# Altium PCB RecycleBin-4-V8.pcbdoc (part 1 of 2)
Units mm, origin at the board's own origin, x right, y up, seen from the top; angles counter-clockwise.
Board outline 100 x 100 mm, 2 copper layers (Top Layer, Bottom Layer); 155 components, 225 nets, 519 pads, 228 vias.
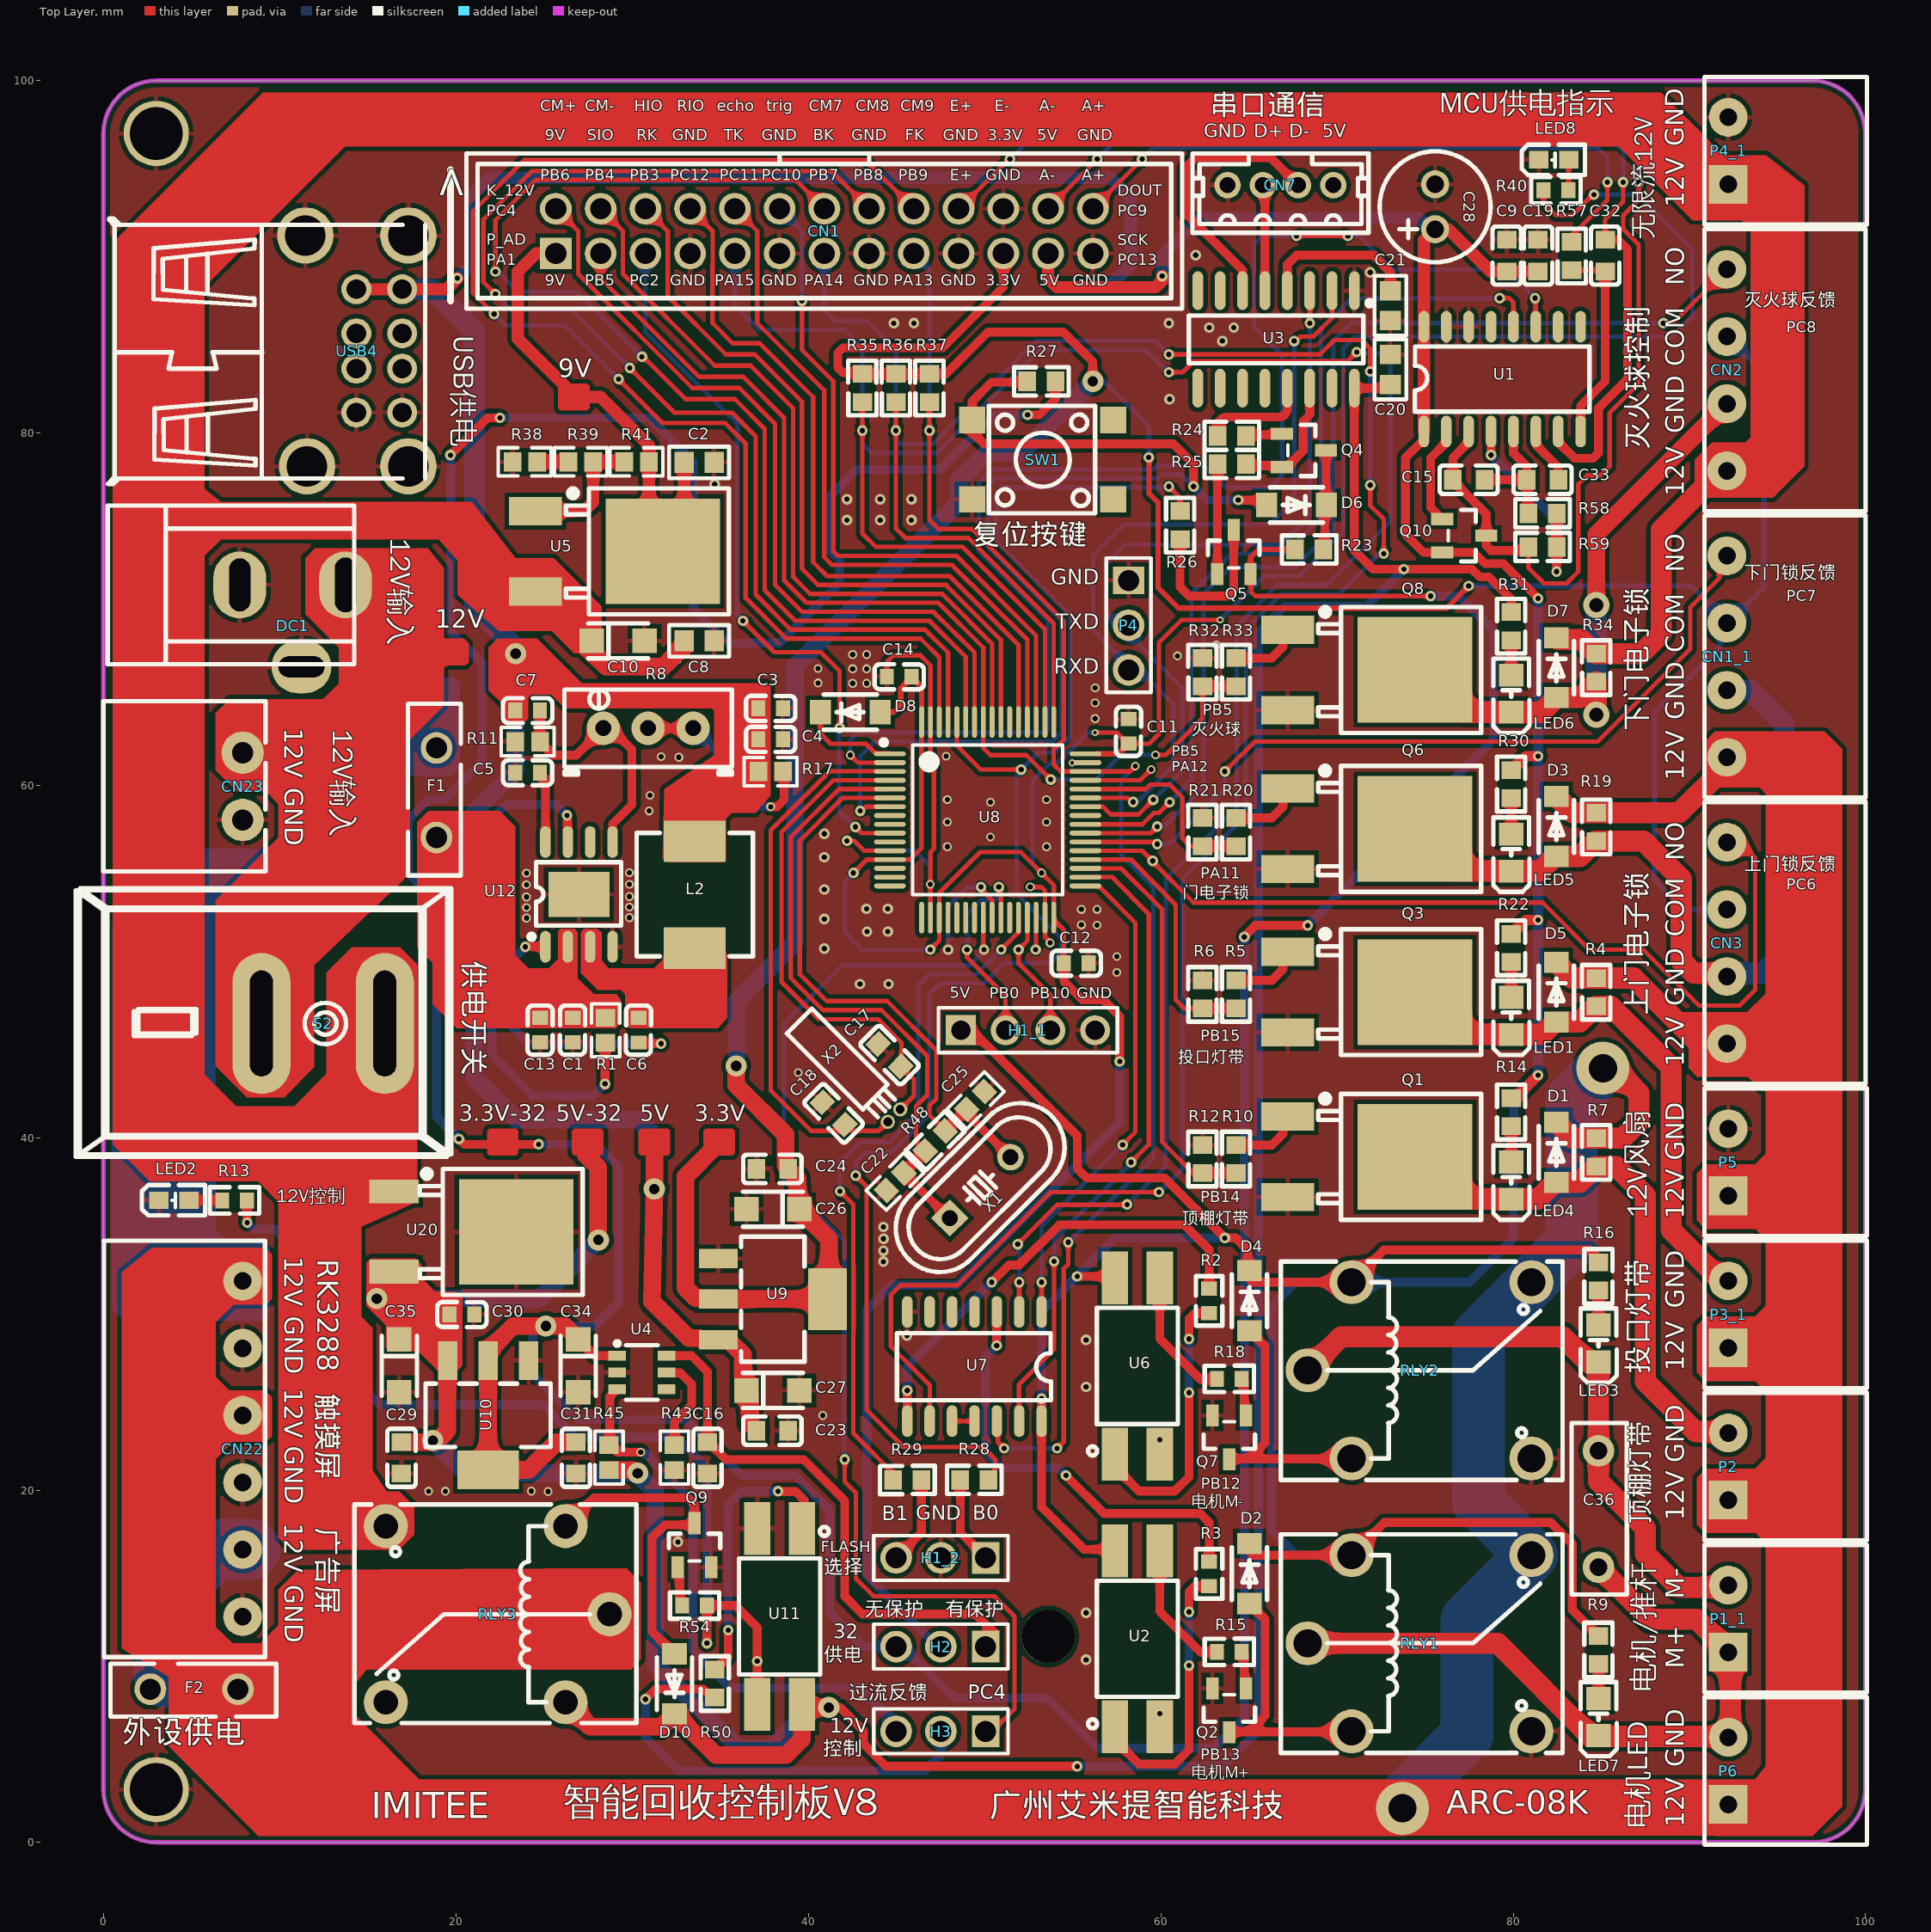
[diagram p0: Top Layer view]
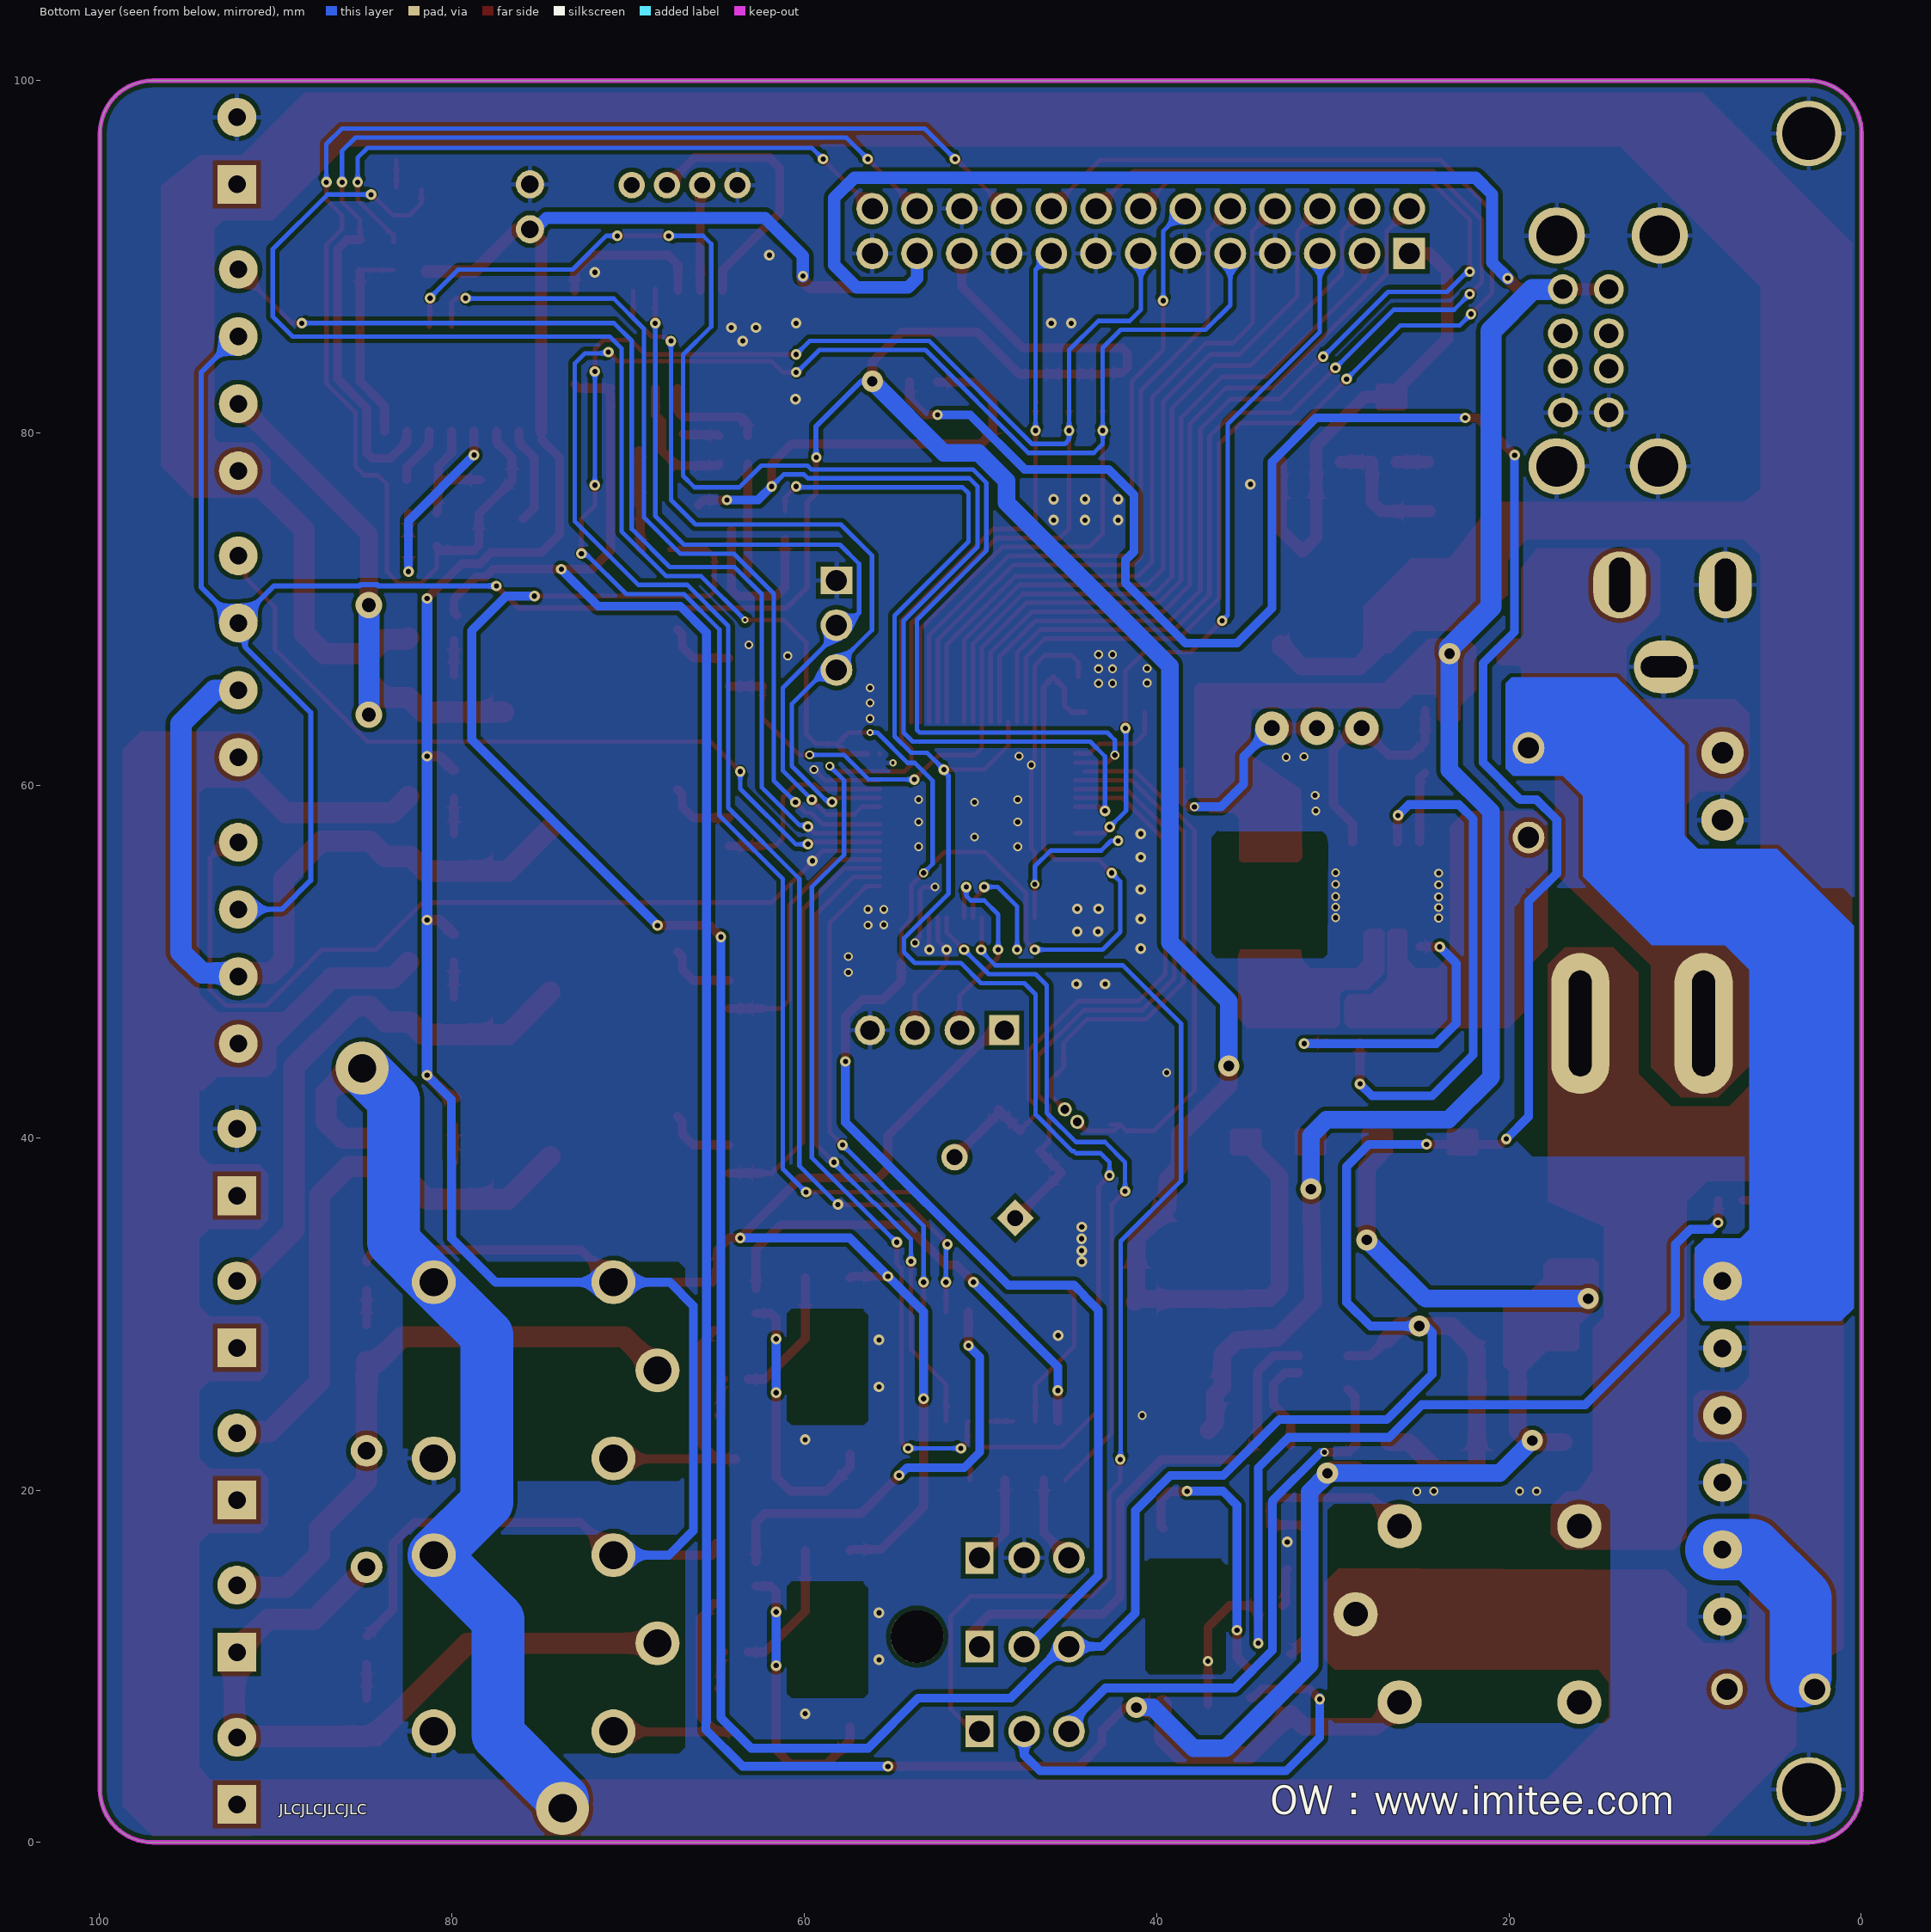
[diagram p1: Bottom Layer view, seen from below]

## Layer stack, top to bottom
Top Solder: solder mask 0.0102, Solder Resist, Dk 3.5
Top Layer: signal copper 0.0356
Dielectric1: dielectric 0.32, FR-4, Dk 4.8
Bottom Layer: signal copper 0.0356
Bottom Solder: solder mask 0.0102, Solder Resist, Dk 3.5

## Board outline
-0.026,3 -0.026,97 cw(c2.974,97) 2.974,100 96.974,100 cw(c96.974,97) 99.974,97 99.974,3 cw(c96.974,3) 96.974,0 2.974,0 cw(c2.974,3)

## Design rules (kind name [scope] priority, off if disabled: settings)
Clearance [All] p1: gap=0.254 ignorepadtopadclearanceinfootprint=FALSE except(0: Arc-Hole Track-Hole SMDPad-Hole THPad-Hole Via-Hole Fill-Hole Poly-Hole Region-Hole Text-Hole)
PolygonConnect [All] p1: connectstyle=Relief reliefconductorwidth=0.254 reliefentries=4 polygonreliefangle="90 Angle" airgapwidth=0.254
RoutingVias [All] p1: holewidth=0.711 width=1.27 viastyle="Through Hole" minholewidth=0.711 minwidth=1.27 maxholewidth=0.711 maxwidth=1.27
SolderMaskExpansion [All] p1: expansion=0.102
Width [All] p1: maxlimit=3 minlimit=0.254 preferedwidth=0.5 minimp=50.000000 maximp=50.000000 favimp=50.000000
30 further rules are at their usual default settings.

## Components (designator, comment, footprint, x,y, rotation, side; value= is the part's Value field where it differs from the comment)
C1 "10uf" C0603#1 26.61,46.105 r90 top (schematic designator C39)
C2 "1uF" C0603#2 34.638,78.325 r180 top
C3 "22 uf" C0603#1 37.846,64.376 r180 top (schematic designator C36)
C4 "22 uf" C0603#1 37.846,62.618 r180 top (schematic designator C37)
C5 "0.1uf" C0603#1 24.052,60.706 r0 top (schematic designator C34)
C6 "0.1uf" C0603#1 30.353,46.101 r90 top (schematic designator C35)
C7 "200pf" C0603#1 24.052,64.249 r180 top (schematic designator C16)
C8 "10nF" C0603#2 34.638,68.199 r180 top
C9 "1uF" C0603#3 79.629,90.071 r90 top
C10 "10uF" CAP-SMD_L3.2-W1.6-R-RD 29.184,68.199 r180 top
C11 "100nF" C0603#1 58.168,63.064 r90 top (schematic designator C7)
C12 "100nF" C0603#1 55.189,49.911 r180 top (schematic designator C7)
C13 "10 uf" C0603#1 24.767,46.105 r90 top (schematic designator C38)
C14 "100nF" C0603#1 45.14,66.167 r180 top (schematic designator C7)
C15 "1uF" C0603#3 77.469,77.343 r0 top
C16 "470nF" C0603#3 34.263,21.831 r90 top (schematic designator C9)
C17 "10pF" C0603#3 44.596,44.682 r315 top
C18 "10pF" C0603#3 41.421,41.38 r315 top
C19 "100nF" C0603#3 81.407,90.071 r90 top
C20 "100nF" C0603#2 73.025,82.756 r90 top
C21 "100nF" C0603#2 73.025,88.072 r270 top
C22 "22pF" 0603 44.907,37.503 r45 top
C23 "100nF" C0603#3 37.945,23.368 r180 top (schematic designator C9)
C24 "100nF" C0603#3 37.945,38.227 r180 top (schematic designator C9)
C25 "22pF" 0603 49.479,42.119 r225 top
C26 "10uF" CAP-SMD_L3.2-W1.6-R-RD 37.973,35.941 r0 top
C27 "10uF" CAP-SMD_L3.2-W1.6-R-RD 37.973,25.654 r180 top
C28 "220uF" CAP-TH_BD6.3-P2.50-D1.0-FD 75.565,92.837 r90 top
C29 "100nF" C0603#3 16.891,21.831 r90 top (schematic designator C9)
C30 "22uF" C0603#1 20.32,29.972 r180 top
C31 "100nF" C0603#3 26.797,21.831 r90 top (schematic designator C9)
C32 "100nF" C0603#3 85.217,90.071 r90 top
C33 "1uF" C0603#3 81.661,77.343 r180 top
C34 "10uF" CAP-SMD_L3.2-W1.6-R-RD 26.924,27.051 r90 top
C35 "10uF" CAP-SMD_L3.2-W1.6-R-RD 16.764,27.051 r90 top
C36 "100nF" CAP-TH_L13.0-W6.0-P10.00-D0.6 84.836,18.83 r270 top
CN1 "Shenzhen" CONN-TH_26P-P2.54_B-3000S26P-0110 40.894,91.46 r0 top
CN1_1 "WJ15EDGRC-3.81-4P" CONN-TH_WJ15EDGRC-3.81-4P 92.122,67.31 r90 top (schematic designator CN1)
CN2 "WJ15EDGRC-3.81-4P" CONN-TH_WJ15EDGRC-3.81-4P 92.122,83.566 r90 top
CN3 "WJ15EDGRC-3.81-4P" CONN-TH_WJ15EDGRC-3.81-4P 92.122,51.054 r90 top
CN7 "A2001WV-4P" CONN-TH_A2001WV-4P 66.786,94.061 r180 top
CN22 "WJ15EDGRC-3.81-6P" CONN-TH_WJ15EDGRC-3.81-6P 7.874,22.336 r270 top
CN23 "KF2EDGR-3.81-2P" CONN-TH_2P-P3.81_KF2EDGR-3.81-2P 7.874,59.944 r270 top
D1 "1N4148W T4" SOD-123_L2.8-W1.8-LS3.7-RD 82.448,39.167 r270 top
D2 "1N4148W T4" SOD-123_L2.8-W1.8-LS3.7-RD 65.024,15.257 r270 top
D3 "1N4148W T4" SOD-123_L2.8-W1.8-LS3.7-RD 82.448,57.666 r270 top
D4 "1N4148W T4" SOD-123_L2.8-W1.8-LS3.7-RD 65.024,30.747 r270 top
D5 "1N4148W T4" SOD-123_L2.8-W1.8-LS3.7-RD 82.448,48.26 r270 top
D6 "1N4148W T4" SOD-123_L2.8-W1.8-LS3.7-RD 67.691,75.912 r180 top
D7 "1N4148W T4" SOD-123_L2.8-W1.8-LS3.7-RD 82.448,66.675 r270 top
D8 "1N4148W T4" SOD-123_L2.8-W1.8-LS3.7-RD 42.364,64.152 r0 top (schematic designator D6)
D10 "1N4148W T4" SOD-123_L2.8-W1.8-LS3.7-RD 32.385,9.004 r90 top
DC1 "DC-5.5*2.1" DC5.5*2.1MM 10.711,69.049 r90 top
F1 "A30-300" FUSE-TH_11.4-W3.0-P5.10-D0.8-S1.20#1 18.761,60.579 r270 top
F2 "A30-300" FUSE-TH_11.4-W3.0-P5.10-D0.8-S1.20#2 6.075,8.636 r180 top (schematic designator F1)
H1_1 "Header-Male-2.54_1x4_C59481" HDR-TH_4P-P2.54-V 52.451,46.101 r0 top (schematic designator H1)
H1_2 "Header-Male-2.54_1x3" HDR-TH_3P-P2.54-V 47.51,16.15 r180 top (schematic designator H1)
H2 "Header-Male-2.54_1x3" HDR-TH_3P-P2.54-V 47.51,11.115 r180 top
H3 "Header-Male-2.54_1x3" HDR-TH_3P-P2.54-V 47.51,6.307 r180 top
L2 "10uh" IND-SMD_L7.0-W6.6_FXL0630 33.537,53.792 r90 top
LED1 "17-21/GHC-XS1T2M/3T" LED0805-R-RD 79.883,46.911 r90 top
LED2 "19-217/GHC-YR1S2/3T" LED0603-R-RD 3.975,36.449 r0 top
LED3 "17-21/GHC-XS1T2M/3T" LED0805-R-RD 84.836,28.321 r90 top
LED4 "17-21/GHC-XS1T2M/3T" LED0805-R-RD 79.883,37.564 r90 top
LED5 "17-21/GHC-XS1T2M/3T" LED0805-R-RD 79.883,56.182 r90 top
LED6 "17-21/GHC-XS1T2M/3T" LED0805-R-RD 79.883,65.199 r90 top
LED7 "17-21/GHC-XS1T2M/3T" LED0805-R-RD 84.836,7.116 r90 top
LED8 "19-217/GHC-YR1S2/3T" LED0603-R-RD 82.296,95.504 r0 top (schematic designator LED2)
P1_1 "WJ15EDGRC-3.81-2P" CONN-TH_2P-P3.81_WJ15EDGRC-3.81-2P 92.202,12.7 r90 top (schematic designator P1)
P2 "WJ15EDGRC-3.81-2P" CONN-TH_2P-P3.81_WJ15EDGRC-3.81-2P 92.202,21.336 r90 top
P3_1 "WJ15EDGRC-3.81-2P" CONN-TH_2P-P3.81_WJ15EDGRC-3.81-2P 92.202,29.972 r90 top (schematic designator P3)
P4 "Header-Female-2.54_1x3" HDR-TH_3P-P2.54-V 58.166,69.088 r270 top
P4_1 "WJ15EDGRC-3.81-2P" CONN-TH_2P-P3.81_WJ15EDGRC-3.81-2P 92.202,96.012 r90 top (schematic designator P4)
P5 "WJ15EDGRC-3.81-2P" CONN-TH_2P-P3.81_WJ15EDGRC-3.81-2P 92.202,38.608 r90 top
P6 "WJ15EDGRC-3.81-2P" CONN-TH_2P-P3.81_WJ15EDGRC-3.81-2P 92.202,4.064 r90 top
Q1 "AOD4184L" TO-252-2_L6.6-W6.1-P4.57-LS9.9-TL-CW 70.805,38.913 r0 top
Q2 "S8050_C266592" SOT-23-3_L2.9-W1.3-P1.90-LS2.4-BR 63.881,7.493 r90 top
Q3 "AOD4184L" TO-252-2_L6.6-W6.1-P4.57-LS9.9-TL-CW 70.805,48.26 r0 top
Q4 "S8050" SOT-23-3_L2.9-W1.6-P1.90-LS2.8-BR 68.116,79.006 r180 top
Q5 "S8550" SOT-23-3_L2.9-W1.3-P1.90-LS2.4-BR 64.135,73.245 r270 top
Q6 "AOD4184L" TO-252-2_L6.6-W6.1-P4.57-LS9.9-TL-CW 70.805,57.531 r0 top
Q7 "S8050_C266592" SOT-23-3_L2.9-W1.3-P1.90-LS2.4-BR 63.881,22.987 r90 top
Q8 "AOD4184L" TO-252-2_L6.6-W6.1-P4.57-LS9.9-TL-CW 70.805,66.548 r0 top
Q9 "S8050_C266592" SOT-23-3_L2.9-W1.3-P1.90-LS2.4-BR 33.528,16.869 r270 top
Q10 "S8550" SOT-23-3_L2.9-W1.6-P1.90-LS2.8-BR 77.216,74.168 r180 top
R1 "100K" 0603 28.474,46.101 r90 top (schematic designator R39)
R2 "1K" R0603#1 62.738,30.734 r90 top
R3 "1K" R0603#1 62.738,15.24 r90 top
R4 "51K" R0603#2 84.709,48.26 r90 top
R5 "100" R0603#2 64.262,48.133 r90 top
R6 "10K" R0603#2 62.357,48.133 r90 top
R7 "51K" R0603#2 84.709,39.167 r90 top
R8 "20k" RES-ADJ-TH_3P-L9.5-W4.9-P2.50-L_3296W 30.897,63.24 r0 top (schematic designator R36)
R9 "4.7K" R0603#2 84.836,10.922 r90 top
R10 "100" R0603#2 64.262,38.786 r90 top
R11 "10K" 0603 24.052,62.478 r180 top (schematic designator R39)
R12 "10K" R0603#2 62.357,38.786 r90 top
R13 "1K" R0603#1 7.416,36.441 r180 top
R14 "2K" R0603#2 79.883,41.453 r90 top
R15 "510" R0603#1 63.881,10.814 r0 top
R16 "4.7K" R0603#2 84.836,32.131 r90 top
R17 "30K" 0603 37.846,60.775 r0 top (schematic designator R39)
R18 "510" R0603#1 63.881,26.308 r0 top
R19 "51K" R0603#2 84.709,57.634 r90 top
R20 "100" R0603#2 64.262,57.348 r90 top
R21 "10K" R0603#2 62.357,57.348 r90 top
R22 "2K" R0603#2 79.883,50.774 r90 top
R23 "10K" R0603#2 68.416,73.389 r180 top
R24 "1K" R0603#2 64.019,79.831 r0 top
R25 "1K" R0603#2 64.02,78.244 r180 top
R26 "1K" R0603#2 61.087,74.769 r270 top
R27 "10K" R0603#2 53.213,82.931 r180 top
R28 "0" R0603#2 49.403,20.574 r0 top
R29 "10K" R0603#2 45.606,20.573 r0 top
R30 "2K" R0603#2 79.883,60.071 r90 top
R31 "2K" R0603#2 79.883,69.028 r90 top
R32 "10K" R0603#2 62.357,66.421 r90 top
R33 "100" R0603#2 64.262,66.421 r90 top
R34 "51K" R0603#2 84.709,66.675 r90 top
R35 "100" R0603#2 43.053,82.55 r90 top
R36 "100" R0603#2 44.957,82.55 r90 top
R37 "100" R0603#2 46.863,82.55 r90 top
R38 "1.5K" 0603 23.891,78.359 r0 top
R39 "1K" 0603 27.066,78.359 r0 top (schematic designator R38)
R40 "1K" R0603#1 82.423,93.782 r0 top (schematic designator R13)
R41 "6.2K" 0603 30.233,78.359 r0 top (schematic designator R39)
R43 "14K" 0603 32.385,21.844 r90 top (schematic designator R39)
R45 "1K" 0603 28.671,21.844 r90 top (schematic designator R39)
R48 "1M" R0603#2 47.193,39.819 r45 top
R50 "1K" R0603#2 34.671,9.017 r270 top
R54 "510" R0603#1 33.528,13.443 r180 top
R57 "1K" R0603#2 83.312,90.044 r270 top
R58 "8.2K" R0603#2 81.661,75.438 r0 top
R59 "20K" R0603#2 81.661,73.533 r180 top
RLY1 "SRA-05VDC-CL blue" RELAY-TH_SRA-9VDC-CL#1 74.676,11.307 r0 top
RLY2 "SRA-05VDC-CL blue" RELAY-TH_SRA-9VDC-CL#1 74.676,26.797 r0 top
RLY3 "SRA-05VDC-CL blue" RELAY-TH_SRA-9VDC-CL#2 22.352,12.954 r180 top
S2 "KCD1-101" KCD1-101 12.444,46.482 r90 top
SW1 "PTS645SH43SMTR92LFS" KEY-SMD_4P-L6.0-W6.0-P4.50-LS9.0 53.29,78.486 r0 top
U1 "HX711" SOP-16_L10.0-W3.9-P1.27-LS6.0-BL 79.375,83.058 r0 top
U2 "EL817S1(C)(TU)-F" OPTO-SMD-4_L4.6-W6.5-P2.54-LS10.3-TL 58.66,11.557 r90 top
U3 "CH340C" SOP-16_150MIL 66.537,85.31 r270 top
U4 "SGM2523" SOT-23-6_L2.9-W1.6-P0.95-LS2.8-BR 30.533,26.67 r180 top
U5 "LM317MDT-TR" TO-252-2_L6.6-W6.1-P4.57-LS9.9-TL 28.108,73.279 r0 top
U6 "EL817S1(C)(TU)-F" OPTO-SMD-4_L4.6-W6.5-P2.54-LS10.3-TL 58.66,27.047 r90 top (schematic designator U1)
U7 "74HC08D,653" SOIC-14_L8.7-W3.9-P1.27-LS6.0-BL 49.415,27.011 r180 top (schematic designator U1)
U8 "STM32F103RBT6" LQFP-64_L10.0-W10.0-P0.50-LS12.0-BL 50.165,58.039 r270 top
U9 "AMS1117-3.3" SOT-223-3_L6.5-W3.4-P2.30-LS7.0-BR 37.973,30.836 r180 top
U10 "AMS1117-3.3" SOT-223-3_L6.5-W3.4-P2.30-LS7.0-BR 21.811,24.241 r90 top
U11 "EL817S1(C)(TU)-F" OPTO-SMD-4_L4.6-W6.5-P2.54-LS10.3-TL 38.354,12.827 r270 top (schematic designator U2)
U12 "FR9888SPGTR" SOIC-8_L5.0-W4.0-P1.27-LS6.0-BL-EP 26.967,53.81 r0 top (schematic designator U4)
U20 "L78M05CDT-TR" TO-252-2_L6.5-W6.1-P4.58-LS10.0-TL 19.939,34.671 r0 top
USB4 "Double layer DIP 90° white" USB-A-TH_USB-M-51 14.357,84.656 r270 top
X1 "8MHz" HC-49US_L11.5-W4.5-P4.88 49.739,37.166 r45 top
X2 "32.768KHz" OSC-TH_BD2.0-P0.70-D0.3 44.85,41.253 r315 top

## Footprints (in the part's own frame and the unit in brackets; to place one, negate y for a bottom-side part, rotate by r counter-clockwise, add the part's x,y. Pads: shape width x height; smd on the part's side, far side on the other; paste and mask are expansions set on the pad)
0603 [mm]
  rect 1x1.1 smd: 1(-0.7,0) 2(0.7,0)
  silkscreen extent -1.5,-0.8 1.5,0.8
C0603#1 [mm]
  rect 0.8x0.9 smd: 1(-0.7,0) 2(0.7,0)
  silkscreen extent -1.4,-0.7 1.4,0.72
C0603#2 [mm]
  rect 1.1x1.199 smd: 1(0,0) 2(1.699,0)
  silkscreen extent -0.85,-0.9 2.55,0.9
C0603#3 [mm]
  rect 1x1.1 smd: 1(-0.9,0) 2(0.9,0)
  silkscreen extent -1.65,-0.8 1.65,0.8
CAP-SMD_L3.2-W1.6-R-RD [mm]
  rect 1.4x1.4 smd: 1(1.5,0) 2(-1.5,0)
  silkscreen extent -1.7,-1 1.7,1
CAP-TH_BD6.3-P2.50-D1.0-FD [mm]
  round 1.6 hole 1: 1(-1.27,0) 2(1.27,0)
  silkscreen extent -3.15,-3.15 3.15,3.15
CAP-TH_L13.0-W6.0-P10.00-D0.6 [mm]
  round 1.8 hole 1: 1(-3.396,0) 2(3.209,0)
  silkscreen extent -4.98,-1.52 4.77,1.61
CONN-TH_2P-P3.81_KF2EDGR-3.81-2P [mm]
  round 2.4 hole 1.2: 1(-1.905,0) 2(1.905,0)
  silkscreen extent -4.83,-7.9 4.83,1.3
CONN-TH_2P-P3.81_WJ15EDGRC-3.81-2P [mm]
  rect 2.2x2.2 hole 1: 1(-1.905,0)
  round 2.2 hole 1: 2(1.905,0)
  silkscreen extent -4.19,-7.88 4.19,1.35
CONN-TH_26P-P2.54_B-3000S26P-0110 [mm]
  rect 1.8x1.8 hole 1.2: 1(-15.24,-1.27)
  round 1.8 hole 1.2: 2(-15.24,1.27) 3(-12.7,-1.27) 4(-12.7,1.27) 5(-10.16,-1.27) 6(-10.16,1.27) 7(-7.62,-1.27) 8(-7.62,1.27) 9(-5.08,-1.27) 10(-5.08,1.27) 11(-2.54,-1.27) 12(-2.54,1.27) 13(0,-1.27) 14(0,1.27) 15(2.54,-1.27) 16(2.54,1.27) 17(5.08,-1.27) 18(5.08,1.27) 19(7.62,-1.27) 20(7.62,1.27) 21(10.16,-1.27) 22(10.16,1.27) 23(12.7,-1.27) 24(12.7,1.27) 25(15.24,-1.27) 26(15.24,1.27)
  silkscreen extent -20.31,-4.4 20.31,4.4
CONN-TH_A2001WV-4P [mm]
  round 1.5 hole 0.9: 1(3,0) 2(1,0) 3(-1,0) 4(-3,0)
  silkscreen extent -5,-1.8 5,2.7
CONN-TH_WJ15EDGRC-3.81-4P [mm]
  round 2.2 hole 1: 1(-5.715,0) 2(-1.905,0) 3(1.905,0) 4(5.715,0)
  silkscreen extent -8,-7.88 8,1.27
CONN-TH_WJ15EDGRC-3.81-6P [mm]
  round 2.2 hole 1: 1(-9.525,0) 2(-5.715,0) 3(-1.905,0) 4(1.905,0) 5(5.715,0) 6(9.525,0)
  silkscreen extent -11.81,-7.88 11.81,1.27
DC5.5*2.1MM [mm]
  oval 3.8x3 hole 1.2 slot 3.1 at 0 deg copper offset 0.001,0: 1(2.325,-3.001)
  oval 3.8x3 hole 1.2 slot 3 at 0 deg: 2(2.325,2.999)
  oval 3x3.4 hole 1.2 slot 2.6 at 90 deg copper offset -0.001,0: 3(-2.325,-0.5)
  silkscreen extent -2.17,-3.5 6.83,10.5
FUSE-TH_11.4-W3.0-P5.10-D0.8-S1.20#1 [mm]
  round 1.8 hole 1.2: 1(-1.54,0.12) 2(3.54,0.12)
  silkscreen extent -4.05,-1.5 5.7,1.5
FUSE-TH_11.4-W3.0-P5.10-D0.8-S1.20#2 [mm]
  round 1.8 hole 1.2: 1(-1.54,-0.064) 2(3.44,-0.064)
  silkscreen extent -3.7,-1.5 5.7,1.5
HC-49US_L11.5-W4.5-P4.88 [mm]
  rect 1.5x1.5 hole 0.9: 1(-2.438,0)
  round 1.5 hole 0.9: 2(2.438,0)
  silkscreen extent -5.74,-2.5 5.74,2.5
HDR-TH_3P-P2.54-V [mm]
  rect 1.575x1.8 hole 1.2: 1(-2.54,0)
  round 1.8 hole 1.2: 2(0,0) 3(2.54,0)
  silkscreen extent -3.81,-1.27 3.81,1.27
HDR-TH_4P-P2.54-V [mm]
  rect 1.7x1.7 hole 1.1: 1(-3.81,0)
  round 1.7 hole 1.1: 2(-1.27,0) 3(1.27,0) 4(3.81,0)
  silkscreen extent -5.08,-1.27 5.08,1.27
IND-SMD_L7.0-W6.6_FXL0630 [mm]
  rect 2.35x3.5 smd: 1(-3.035,0) 2(3.035,0)
  silkscreen extent -3.5,-3.3 3.5,3.3
KCD1-101 [mm]
  oval 8x3.3 hole 1.3 slot 6 at 0 deg copper offset 0,0: 1(0,-3.5) 2(0,3.5)
  silkscreen extent -7.56,-7.28 7.68,14.04
KEY-SMD_4P-L6.0-W6.0-P4.50-LS9.0 [mm]
  rect 1.5x1.5 smd: 1(-4,2.25) 2(4,2.25) 3(-4,-2.25) 4(4,-2.25)
  silkscreen extent -3.05,-3.05 2.98,3.05
LED0603-R-RD [mil]
  rect 43x39 smd: 1(33.5,0) 2(-33.5,0)
  silkscreen extent -72,-34 70,34
LED0805-R-RD [mm]
  rect 1.3x1.4 smd: 1(1.05,0) 2(-1.05,0)
  silkscreen extent -2.22,-1.04 1.99,1.01
LQFP-64_L10.0-W10.0-P0.50-LS12.0-BL [mm]
  oval 0.28x1.796 smd: 1(-3.75,-5.55) 2(-3.25,-5.55) 3(-2.75,-5.55) 4(-2.25,-5.55) 5(-1.75,-5.55) 6(-1.25,-5.55) 7(-0.75,-5.55) 8(-0.25,-5.55) 9(0.25,-5.55) 10(0.75,-5.55) 11(1.25,-5.55) 12(1.75,-5.55) 13(2.25,-5.55) 14(2.75,-5.55) 15(3.25,-5.55) 16(3.75,-5.55) 33(3.75,5.55) 34(3.25,5.55) 35(2.75,5.55) 36(2.25,5.55) 37(1.75,5.55) 38(1.25,5.55) 39(0.75,5.55) 40(0.25,5.55) 41(-0.25,5.55) 42(-0.75,5.55) 43(-1.25,5.55) 44(-1.75,5.55) 45(-2.25,5.55) 46(-2.75,5.55) 47(-3.25,5.55) 48(-3.75,5.55)
  oval 1.796x0.28 smd: 17(5.55,-3.75) 18(5.55,-3.25) 19(5.55,-2.75) 20(5.55,-2.25) 21(5.55,-1.75) 22(5.55,-1.25) 23(5.55,-0.75) 24(5.55,-0.25) 25(5.55,0.25) 26(5.55,0.75) 27(5.55,1.25) 28(5.55,1.75) 29(5.55,2.25) 30(5.55,2.75) 31(5.55,3.25) 32(5.55,3.75) 49(-5.55,3.75) 50(-5.55,3.25) 51(-5.55,2.75) 52(-5.55,2.25) 53(-5.55,1.75) 54(-5.55,1.25) 55(-5.55,0.75) 56(-5.55,0.25) 57(-5.55,-0.25) 58(-5.55,-0.75) 59(-5.55,-1.25) 60(-5.55,-1.75) 61(-5.55,-2.25) 62(-5.55,-2.75) 63(-5.55,-3.25) 64(-5.55,-3.75)
  silkscreen extent -4.55,-6.05 4.25,4.25
OPTO-SMD-4_L4.6-W6.5-P2.54-LS10.3-TL [mm]
  rect 3x1.5 smd: 1(-5,1.27) 2(-5,-1.27) 3(5,-1.27) 4(5,1.27)
  silkscreen extent -5.08,-2.3 3.3,2.79
OSC-TH_BD2.0-P0.70-D0.3 [mm]
  round 0.8 hole 0.5: 1(0,0.5) 2(0,-0.5)
  silkscreen extent -7.6,-1 -0.54,1
R0603#1 [mm]
  rect 0.8x0.9 smd: 1(-0.7,0) 2(0.7,0)
  silkscreen extent -1.4,-0.75 1.4,0.76
R0603#2 [mm]
  rect 1x1.1 smd: 1(-0.8,0) 2(0.8,0)
  silkscreen extent -1.55,-0.8 1.55,0.81
RELAY-TH_SRA-9VDC-CL#1 [mm]
  round 2.5 hole 1.6: 1(-6.35,-0.001) 2(-3.851,-5) 3(6.35,-5) 4(6.35,5) 5(-3.851,5)
  silkscreen extent -7.87,-6.22 8.13,6.18
RELAY-TH_SRA-9VDC-CL#2 [mm]
  round 2.5 hole 1.4: 1(-6.35,-0.001) 2(-3.851,-5) 3(6.35,-5) 4(6.35,5) 5(-3.851,5)
  silkscreen extent -7.87,-6.22 8.13,6.18
RES-ADJ-TH_3P-L9.5-W4.9-P2.50-L_3296W [mm]
  round 1.9 hole 0.9: 1(-2.55,0) 2(-0.01,0) 3(2.55,0)
  silkscreen extent -4.75,-2.64 4.75,2.2
SOD-123_L2.8-W1.8-LS3.7-RD [mm]
  rect 1.2x1.4 smd: 1(-1.7,0) 2(1.7,0)
  silkscreen extent -1.5,-1 1.5,1
SOIC-8_L5.0-W4.0-P1.27-LS6.0-BL-EP [mm]
  oval 0.6x1.8 smd: 1(-1.905,-2.972) 2(-0.635,-2.972) 3(0.635,-2.972) 4(1.905,-2.972) 5(1.905,2.972) 6(0.635,2.972) 7(-0.635,2.972) 8(-1.905,2.972)
  rect 3.45x2.56 smd: 9(0,0)
  silkscreen extent -2.84,-2.56 2.39,1.83
SOIC-14_L8.7-W3.9-P1.27-LS6.0-BL [mm]
  oval 0.6x1.798 smd: 1(-3.81,-3.1) 2(-2.54,-3.1) 3(-1.27,-3.1) 4(0,-3.1) 5(1.27,-3.1) 6(2.54,-3.1) 7(3.81,-3.1) 8(3.81,3.1) 9(2.54,3.1) 10(1.27,3.1) 11(0,3.1) 12(-1.27,3.1) 13(-2.54,3.1) 14(-3.81,3.1)
  silkscreen extent -4.34,-1.9 4.4,1.91
SOP-16_150MIL [mm]
  oval 2.198x0.6 smd: 1(-2.769,4.445) 2(-2.769,3.175) 3(-2.769,1.905) 4(-2.769,0.635) 5(-2.769,-0.635) 6(-2.769,-1.905) 7(-2.769,-3.175) 8(-2.769,-4.445) 9(2.769,-4.445) 10(2.769,-3.175) 11(2.769,-1.905) 12(2.769,-0.635) 13(2.769,0.635) 14(2.769,1.905) 15(2.769,3.175) 16(2.769,4.445)
  silkscreen extent -2.2,-4.95 1.35,5.46
SOP-16_L10.0-W3.9-P1.27-LS6.0-BL [mm]
  oval 0.6x1.798 smd: 1(-4.445,-2.972) 2(-3.175,-2.972) 3(-1.905,-2.972) 4(-0.635,-2.972) 5(0.635,-2.972) 6(1.905,-2.972) 7(3.175,-2.972) 8(4.445,-2.972) 9(4.445,2.972) 10(3.175,2.972) 11(1.905,2.972) 12(0.635,2.972) 13(-0.635,2.972) 14(-1.905,2.972) 15(-3.175,2.972) 16(-4.445,2.972)
  silkscreen extent -4.95,-1.85 4.95,1.85
SOT-23-3_L2.9-W1.3-P1.90-LS2.4-BR [mm]
  rect 1.25x0.7 smd: 1(1.25,-0.95) 2(1.25,0.95) 3(-1.25,0)
  silkscreen extent -0.65,-1.46 0.9,1.46
SOT-23-3_L2.9-W1.6-P1.90-LS2.8-BR [mm]
  rect 1.25x0.7 smd: 1(1.25,-0.95) 2(1.25,0.95) 3(-1.25,0)
  silkscreen extent -0.65,-1.46 0.9,1.46
SOT-23-6_L2.9-W1.6-P0.95-LS2.8-BR [mm]
  rect 1x0.55 smd: 1(1.4,-0.95) 2(1.4,0) 3(1.4,0.95) 4(-1.4,0.95) 5(-1.4,0) 6(-1.4,-0.95)
  silkscreen extent -0.9,-1.78 1.52,1.55
SOT-223-3_L6.5-W3.4-P2.30-LS7.0-BR [mm]
  rect 2.2x1.1 smd: 1(3.099,-2.3) 2(3.099,0) 3(3.099,2.3)
  rect 2.2x3.5 smd: 4(-3.099,0)
  silkscreen extent -1.8,-3.55 1.8,3.55
TO-252-2_L6.5-W6.1-P4.58-LS10.0-TL [mm]
  rect 2.8x1.35 smd: 1(-3.475,2.275) 3(-3.475,-2.275)
  rect 6.5x6 smd: 4(3.475,-0.017)
  silkscreen extent -2.01,-3.59 7.24,3.56
TO-252-2_L6.6-W6.1-P4.57-LS9.9-TL [mm]
  rect 3x1.6 smd: 1(-3.617,2.285)
  rect 3.002x1.6 smd: 2(-3.611,-2.285)
  rect 6.5x5.999 smd: 3(3.617,0)
  silkscreen extent -1.88,-3.57 7.37,3.57
TO-252-2_L6.6-W6.1-P4.57-LS9.9-TL-CW [mm]
  rect 3x1.6 smd: 1(-3.617,2.285)
  rect 6.5x5.999 smd: 2(3.617,0)
  rect 3.002x1.6 smd: 3(-3.611,-2.285)
  silkscreen extent -1.88,-3.57 7.37,3.57
USB-A-TH_USB-M-51 [mm]
  round 1.7 hole 1.1: 1(-3.5,2.574) 2(-1.001,2.574) 3(1.001,2.574) 4(3.5,2.574) 5(-3.5,-0.027) 6(-1.001,-0.027) 7(1.001,-0.027) 8(3.5,-0.027)
  round 3.2 hole 2.3: 9(-6.551,-2.925) 9(-6.551,2.925) 9(6.551,-2.826) 9(6.551,2.925)
  silkscreen extent -7.52,-14.13 7.54,3.87

## Free pads (board coordinates)
  round 3.7 hole 3: ""(2.974,3) ""(2.974,97)
  round 1.5 on Top Solder: ""(19.939,67.564) ""(22.606,39.751) ""(26.67,82.042) ""(27.432,39.751) ""(31.242,39.751) ""(34.925,39.751)
  round 3 hole 3: ""(53.594,11.684)

## Via types
v1: diameter 0.6, hole 0.3, Top Layer to Bottom Layer, 152 vias
v2: diameter 0.5, hole 0.3, Top Layer to Bottom Layer, 59 vias
v3: diameter 1.2, hole 0.6, Top Layer to Bottom Layer, 10 vias
v4: diameter 0.4, hole 0.2, Top Layer to Bottom Layer, 3 vias
v5: diameter 1.5, hole 0.8, Top Layer to Bottom Layer, 2 vias
v6: diameter 3, hole 1.6, Top Layer to Bottom Layer, 2 vias

## Nets (pads, with @x,y where several pads share a name; then routed paths per layer and width w, separated by ;. In a path a pad name is that pad's centre, name@x,y a point inside that pad or via, vN(x,y) a via of type N, cw(c..) or ccw(c..) an arc to the next point about the centre after c; other vN are vias at no path point)
3.3V: C24.1 C26.1 CN1.21 CN1_1.3 CN2.3 CN3.3 R35.2 R36.2 R37.2 U9.2 U9.4 | length 199.5
  Top Layer w0.3: v1@59.33,78.613 59.33,76.56 59.831,76.059 59.831,71.233 61.006,70.058 76.212,70.058 v1(77.47,71.316)
  Top Layer w0.5: CN1.21@51.054,90.19 51.054,88.277 47.613,84.836 41.949,84.836 41.656,84.543 41.656,83.713 41.949,83.421 42.982,83.421 R35.2@43.053,83.35 R37.2@46.863,83.35 47.802,83.35 50.177,85.725 54.454,85.725 56.134,84.045 v3(56.134,82.931) v3@56.261,82.931
  Top Layer w1: 34.798,39.586 33.02,37.808 33.02,31.472 33.606,30.886 34.824,30.886 U9.2@34.874,30.836 40.716,30.836 41.148,31.268 41.148,34.266 C26.1@39.473,35.941 39.37,36.044 39.37,37.669 38.734,38.304 38.734,38.354 38.684,38.404 38.684,40.183 35.892,42.975 v3(35.892,44.069) ; U9.4@41.072,30.836 U9.4@41.237,30.671
  Bottom Layer w0.3: v3(56.134,82.931) 56.769,82.931 59.33,80.37 v1@59.33,78.613 ; v1(77.47,71.316) 84.162,71.316 84.231,71.385 85.187,71.385 85.256,71.316 90.101,71.316 91.741,69.676 CN1_1.3@91.741,69.215 ; CN2.3@91.741,85.471 CN2.3@92.122,85.471 92.202,85.471 94.234,83.439 94.234,71.247 91.741,68.754 91.741,67.865 88.011,64.135 88.011,54.61 89.662,52.959 91.186,52.959 CN3.3@91.821,52.324
  Bottom Layer w1: v3(35.892,44.069) 35.901,44.078 35.901,47.743 39.243,51.085 39.243,66.764 48.514,76.035 48.514,77.275 50.106,78.867 52.07,78.867 v3(56.134,82.931)
  other v1: 59.309,78.613
3.3V_32IN: C31.2 C34.1 H2.3 Q5.2 R23.2 R27.1 U4.1 U10.2 U10.4 | length 287.1
  Top Layer w0.254: Q5.2@65.085,71.995 65.106,71.974 65.106,70.989 65.356,70.739 v1(75.311,70.739)
  Top Layer w0.3: Q5.2@65.085,71.995 65.085,72.942 65.531,73.389 R23.2@67.616,73.389
  Top Layer w0.5: v1(19.668,78.74) 21.789,80.861 v1(22.476,80.861) ; v1(20.147,39.93) 20.454,39.624 v1(24.673,39.624) ; C34.1@26.924,28.551 27.855,27.62 U4.1@29.133,27.62 ; v1(52.43,81.026) 53.122,81.026 54.013,81.917 R27.1@54.013,82.931 ; v1(64.731,51.392) 64.731,51.419 65.358,52.046 v1(68.326,52.046)
  Top Layer w1: C31.2@26.797,22.731 25.698,22.731 24.111,21.144 21.813,21.144 U10.4@21.811,21.142 U10.2@21.811,27.34 21.811,27.89 23.225,29.304 v3(25.089,29.304) 26.171,29.304 C34.1@26.924,28.551
  Bottom Layer w0.5: v1(19.668,78.74) 19.685,78.723 19.685,68.707 21.463,66.929 21.463,61.301 19.344,59.182 18.425,59.182 17.282,58.039 17.282,55.002 18.881,53.404 18.881,41.197 v1(20.147,39.93) ; v1(22.476,80.861) 30.945,80.861 33.447,78.359 33.447,70.058 35.433,68.072 38.354,68.072 41.762,71.48 41.762,72.792 41.275,73.279 41.275,76.481 42.726,77.932 47.488,77.932 50.582,81.026 v1(52.43,81.026) v1@52.451,81.026 ; v1@24.7,39.624 27.94,39.624 29.21,38.354 29.21,30.656 27.858,29.304 v3(25.089,29.304) 24.7,29.304 24.352,28.956 24.352,26.575 26.924,24.003 33.034,24.003 36.208,20.828 39.219,20.828 41.2,18.847 41.2,13.022 43.107,11.115 H2.3@44.97,11.115 45.351,11.115 48.273,8.193 53.525,8.193 56.372,5.346 63.004,5.346 64.731,7.073 v1(64.731,51.392) ; v1(68.326,52.046) 78.867,62.587 78.867,68.782 76.91,70.739 v1(75.311,70.739)
3.3V_32OUT: C16.2 H2.1 U4.6 | length 31.4
  Top Layer w0.5: U4.6@31.933,27.62 33.362,27.62 34.263,26.719 C16.2@34.263,22.731 34.313,22.731 35.307,21.737 39.708,21.737 42.054,19.39 42.054,13.953 43.052,12.955 49.462,12.955 50.431,11.986 H2.1@50.431,11.115
5V: C3.2 C4.2 C7.2 C9.1 C19.1 C23.2 C27.1 C28.1 CN1.23 D2.1 D4.1 H1_1.1 L2.2 Q10.2 R9.2 R14.2 R16.2 R17.1 R22.2 R30.2 RLY1.5 RLY2.5 U1.1 U1.16 U2.4 U6.4 U7.14 U9.3 USB4.1 USB4.5 | length 381.7
  Top Layer w0.5: H1_1.1@48.641,46.101 49.266,46.101 55.239,40.128 55.245,40.128 55.245,38.264 55.797,37.711 60.221,37.711 v1(63.627,34.305) 64.247,34.305 64.924,33.628 64.924,32.447 D4.1@65.024,32.447 65.024,32 65.227,31.797 RLY2.5@70.825,31.797 72.656,33.628 84.328,33.628 84.836,33.12 R16.2@84.836,32.931 ; v1(53.225,25.185) U7.14@53.225,23.911 53.225,19.038 55.626,16.637 57.31,16.637 U2.4@57.39,16.557 ; v1(55.245,32.131) 57.306,32.131 U6.4@57.39,32.047 ; D2.1@65.024,16.957 65.024,16.51 65.227,16.307 RLY1.5@70.825,16.307 72.679,18.161 82.129,18.161 83.348,16.942 83.348,13.21 84.536,12.022 84.536,11.972 84.786,11.722 R9.2@84.836,11.722 ; U1.1@74.894,79.608 73.878,78.593 73.878,74.248 74.908,73.218 Q10.2@75.966,73.218 77.771,73.218 78.41,72.579 79.44,72.579 v1(81.407,70.612)
  Top Layer w0.6: R14.2@79.756,42.291 R14.2@79.883,42.253 80.115,42.253 v1(81.407,43.545) ; R22.2@79.883,51.574 79.933,51.574 80.717,52.358 v1(81.407,52.358) ; R30.2@79.883,60.871 79.933,60.871 80.717,61.655 v1(81.407,61.655)
  Top Layer w0.7: USB4.5@14.331,88.156 USB4.1@16.931,88.156 19.436,88.156 v1(20.06,88.779) ; CN1.23@53.594,90.19 53.594,88.773 54.09,88.277 59.702,88.277 60.071,88.646 v1(60.071,88.9) ; U1.1@74.93,80.086 U1.16@74.93,86.03 74.93,90.932 C28.1@75.565,91.567 76.32,91.567 78.716,89.171 C9.1@79.629,89.171 C19.1@81.407,89.171
  Top Layer w1: 31.242,39.878 v3(31.242,37.084) 31.115,30.705 33.196,28.624 33.778,28.624 33.816,28.586 34.824,28.586 U9.3@34.874,28.536 35.424,28.536 36.273,27.687 36.273,25.854 C27.1@36.473,25.654 36.673,25.454 36.673,23.79 37.045,23.418 C23.2@37.045,23.368
  Bottom Layer w0.5: v1(53.225,25.185) 53.225,30.111 v1(55.245,32.131) 57.419,34.305 v1(63.627,34.305) ; RLY1.5@70.825,16.307 67.68,16.307 66.294,17.693 66.294,30.464 67.627,31.797 RLY2.5@70.825,31.797 77.517,31.797 80.01,34.29 80.01,38.735 80.026,38.751 80.026,42.164 v1(81.407,43.545)
  Bottom Layer w0.6: v1(81.407,43.545) v1(81.407,52.358) v1(81.407,61.655) v1(81.407,70.612)
  Bottom Layer w0.7: v1(20.06,88.779) 20.949,89.669 20.949,93.54 21.897,94.488 57.15,94.488 58.293,93.345 58.293,89.535 57.023,88.265 54.102,88.265 53.594,88.773 CN1.23@53.594,90.19 ; v1(60.071,88.9) 60.071,90.043 62.23,92.202 74.632,92.202 75.267,91.567 C28.1@75.565,91.567
  Bottom Layer w1: USB4.1@17.093,88.317 USB4.1@17.272,88.138 ; v3(23.368,67.475) 23.368,60.859 21.021,58.512 21.021,43.425 23.425,41.021 30.349,41.021 31.242,40.128 v3(31.242,37.084)
  Bottom Layer w1.2: USB4.1@17.272,88.138 18.669,88.138 21.021,85.786 21.021,70.139 23.368,67.792 v3(23.368,67.475)
5V_32: C20.1 C29.2 C30.2 C35.1 D10.1 R31.2 R45.1 RLY3.5 U3.16 U10.3 U11.4 U20.3 | length 204.9
  Top Layer w0.5: v3(41.148,7.658) 41.788,7.658 43.107,6.34 43.107,5.606 44.395,4.318 v1(55.245,4.318) ; U3.16@70.982,82.169 70.982,73.33 72.049,72.263 v1(73.787,72.263) 77.66,72.263 78.098,71.825 78.622,71.825 79.883,70.564 R31.2@79.883,69.828 R31.2@79.708,69.653 ; U3.16@70.982,82.541 72.81,82.541 C20.1@73.025,82.756
  Top Layer w1: C29.2@16.891,22.731 18.858,22.731 19.494,23.368 19.494,27.324 U10.3@19.511,27.34 ; RLY3.5@26.203,7.954 27.6,6.557 31.638,6.557 D10.1@32.385,7.304 34.736,4.953 38.711,4.953 39.624,5.866 U11.4@39.624,7.266 ; 27.353,39.327 27.353,39.019 28.067,38.304 v3(28.067,34.197) ; R45.1@28.671,21.144 30.055,21.144 30.244,20.955 v3(30.298,20.955) ; U11.4@39.661,7.864 U11.4@39.624,7.827 U11.4@39.624,7.266 ; v3(41.148,7.658) 40.016,7.658 U11.4@39.624,7.266
  Bottom Layer w0.5: v1(55.245,4.318) 63.5,4.318 65.579,6.397 65.579,6.811 65.54,6.85 65.54,68.67 67.036,70.167 71.691,70.167 v1(73.787,72.263)
  Bottom Layer w1: v3(15.494,30.861) 24.731,30.861 v3(28.067,34.197) ; v3(18.669,22.811) 20.525,20.955 v3(30.298,20.955) 30.298,20.901 31.312,19.886 31.312,10.09 36.056,5.346 37.897,5.346 40.209,7.658 v3(41.148,7.658)
7L_DRIVER: 
7L_GND: D5.2 LED1.2 P3_1.2 Q3.2 R4.1 | length 31.1
  Top Layer w1.2: Q3.2@74.422,48.26 76.822,45.86 LED1.2@79.883,45.86 81.649,45.86 82.348,46.56 D5.2@82.448,46.56 83.759,46.56 84.659,47.46 R4.1@84.709,47.46 85.509,47.46 88.957,44.012 88.957,34.741 P3_1.2@91.948,31.75
9V: C2.2 CN1.1 R41.2 U5.3 | length 28.3
  Top Layer w0.7: CN1.1@25.654,90.19 24.531,90.19 23.495,89.154 23.495,85.344 26.797,82.042 28.194,82.042 30.951,79.285 30.951,78.376 R41.2@30.934,78.359 ; R41.2@30.951,78.342 R41.2@30.934,78.359 ; C2.2@32.922,78.342 C2.2@32.939,78.325 32.939,74.494 U5.3@31.724,73.279 30.934,74.07 R41.2@30.934,78.359
11: U7.4
12B-5V_KEY: 
12V: CN1_1.1 CN3.1 CN22.1 CN22.3 D1.1 D3.1 D5.1 F1.1 F2.1 P2.1 P3_1.1 P5.1 P6.1 R4.2 R7.2 R19.2 RLY1.4 RLY2.4 RLY3.1 | length 163.2
  Top Layer w1.2: D1.1@82.448,40.867 83.348,39.967 R7.2@84.709,39.967 86.195,39.967 87.133,40.905 87.133,42.534 85.725,43.942 v6(85.09,43.942) ; D5.1@82.448,49.96 83.348,49.06 R4.2@84.709,49.06 86.83,49.06 90.551,45.339 CN3.1@91.821,45.339 ; D3.1@82.448,59.366 83.381,58.434 R19.2@84.709,58.434 89.422,58.434 92.122,61.134 CN1_1.1@92.122,61.595
  Top Layer w3: 11.684,6.778 16.017,2.445
  Top Layer w3.2: v6@73.713,1.97 74.177,1.981 P6.1@91.77,1.981
  Top Layer w3.222: 16.017,1.97 v6@73.713,1.97
  Bottom Layer w3: v6@73.713,2.445 77.369,6.102 77.369,12.65 RLY1.4@81.026,16.307 78.022,19.311 78.022,28.793 RLY2.4@81.026,31.797 83.312,34.083 83.312,42.164 v6(85.09,43.942)
  other v6: 73.713,1.937
12v_gao: CN22.5 F2.2 | length 10.4
  Bottom Layer w3.5: 3.429,9.398 3.429,13.843 6.207,16.621 CN22.5@8.255,16.621
12V_IN: C8.2 C10.1 CN2.1 D7.1 P4_1.1 R34.2 RLY3.3 S2.1 U5.2 U20.1 | length 29.7
  Top Layer w0.5: C8.2@32.939,68.036 C8.2@32.939,68.199
  Top Layer w1: U5.2@24.497,70.994 26.542,70.994 27.484,70.052 27.484,68.399 C10.1@27.685,68.199 27.685,67.565 28.505,66.745 31.766,66.745 32.939,67.918 C8.2@32.939,68.036
  Top Layer w1.2: D7.1@82.448,68.375 82.548,68.275 83.859,68.275 84.659,67.475 R34.2@84.709,67.475 87.249,67.475 88.392,68.618 88.392,74.502 CN2.1@91.741,77.851
12V_KEY: CN23.1 DC1.1 S2.2 | length 8.4
  Top Layer w0.7: DC1.1@13.711,71.374 13.711,70.975 17.184,67.502 20.272,67.502
12V_OUT:  | length 0.4
  Top Layer w1: 16.002,17.954 16.002,18.36
12VCONTROL: H3.2 R50.2 | length 26.1
  Top Layer w0.5: v1(30.74,8.128) 31.312,8.7 34.025,8.7 34.508,8.217 R50.2@34.671,8.217
  Bottom Layer w0.5: v1@30.74,8.242 v1(30.74,8.128) 30.74,5.963 32.639,4.064 46.609,4.064 47.51,4.965 47.51,5.926 H3.2@47.891,6.307
32POWER: C11.1 C12.2 C14.1 D8.2 H2.2 R40.1 U8.13 U8.19 U8.32 U8.48 U8.64 | length 174.5
  Top Layer w0.254: v1@42.545,55.015 43.319,55.789 U8.13@44.615,55.789 45.756,55.789 46.41,56.443 46.41,62.819 46.415,62.824 U8.64@46.415,63.589 ; v1(46.907,50.673) 47.415,51.181 U8.19@47.415,52.489 47.415,53.892 49.729,56.206 52.046,56.206 v2(53.225,55.027) 53.923,54.329 53.923,52.376 54.483,51.816 54.483,49.917 C12.2@54.489,49.911 ; U8.48@55.71,61.794 U8.48@55.715,61.789 ; v4(56.261,62.992) 57.491,62.992 58.119,62.364 C11.1@58.168,62.364 59.334,62.364 59.888,62.918 59.888,68.108 61.166,69.386 v4(63.362,69.386) ; R40.1@81.723,93.782 81.723,93.049 82.423,92.349 83.335,92.349 v1@84.514,93.528
  Top Layer w0.3: D8.2@44.064,64.152 44.837,64.152 45.232,64.547 45.232,65.51 45.84,66.117 C14.1@45.84,66.167 46.415,65.592 U8.64@46.415,63.589 ; U8.48@56.388,61.789 57.593,61.789 C11.1@58.168,62.364
  Top Layer w0.5: C12.2@54.489,49.911 54.489,48.887 55.546,47.83 56.72,47.83 57.658,46.892 v1(57.658,44.323)
  Bottom Layer w0.254: v1(42.545,55.027) 42.057,54.539 42.057,51.669 43.053,50.673 v1(46.907,50.673) ; v2(53.225,55.027) 52.714,55.538 52.714,60.261 53.73,61.276 54.135,61.276 55.851,62.992 v4(56.261,62.992) v4@56.346,62.992 ; v4(63.362,69.386) 65.858,71.882 67.838,71.882 70.358,74.402 70.358,84.794 71.035,85.471 89.027,85.471 90.17,86.614 90.17,90.424 87.066,93.528 v1(84.582,93.528)
  Bottom Layer w0.5: H2.2@47.852,11.076 47.354,11.076 46.755,11.675 46.755,11.697 43.307,15.145 43.307,30.223 44.134,31.05 44.134,31.077 44.68,31.623 48.405,31.623 57.658,40.876 v1(57.658,44.323)
A+: CN1.26 R57.1 | length 36.4
  Top Layer w0.254: CN1.26@56.134,92.73 v1@58.94,95.536 ; R57.1@83.312,90.844 83.312,91.186 85.344,93.218 v1(85.344,94.234)
  Bottom Layer w0.254: v1(58.928,95.548) 59.565,96.185 84.79,96.185 85.344,95.631 v1@85.344,94.297
A-: C32.2 CN1.24 U1.7 | length 57.2
  Top Layer w0.254: CN1.24@53.594,92.73 53.594,92.742 56.388,95.536 v1(56.388,95.548) ; C32.2@85.217,90.971 85.217,92.114 86.233,93.13 v1(86.233,94.234)
  Top Layer w0.5: U1.7@82.55,80.086 82.55,79.487 83.471,78.566 84.535,78.566 84.836,78.867 84.836,81.407 86.487,83.058 86.487,90.424 85.94,90.971 C32.2@85.217,90.971
  Bottom Layer w0.254: v1(56.388,95.548) 57.61,96.77 85.475,96.77 86.233,96.012 v1(86.233,94.234)
B_GND: CN2.2 D7.2 LED6.2 Q8.2 R34.1 | length 31.1
  Top Layer w1: v5(84.709,70.231) v5@84.709,70.485 ; v5@84.963,70.231 v5@84.709,70.485 ; CN2.2@91.741,81.661 91.741,81.28 84.709,74.248 84.709,71.882 v5@84.709,70.485
  Top Layer w1.2: Q8.2@77.076,64.148 LED6.2@79.883,64.148 81.622,64.148 D7.2@82.448,64.975 83.809,64.975 R34.1@84.709,65.875 v5(84.709,64.008)
  Bottom Layer w1.2: v5(84.709,64.008) v5(84.709,70.231)
B_OUTPUT: 
BOOT0: R26.1 R28.2 U8.60 | length 92.3
  Top Layer w0.254: v1(42.672,37.846) 43.289,37.229 43.289,24.549 45.396,22.441 49.88,22.441 50.584,21.737 R28.2@50.584,20.573 ; U8.60@48.415,63.589 48.415,62.252 49.773,60.893 v1@52.07,60.893 ; v1(60.452,76.962) 61.087,76.327 R26.1@61.087,75.569
  Bottom Layer w0.254: v1(42.672,37.846) 42.672,38.608 43.18,39.116 44.577,39.116 44.704,39.243 44.787,39.243 46.863,41.319 46.863,48.133 47.498,48.768 49.96,48.768 51.103,49.911 53.721,49.911 54.338,50.528 54.338,51.315 51.811,53.843 51.811,60.537 52.07,60.797 v1(52.07,60.89) 53.029,61.849 53.931,61.849 54.864,62.782 54.864,69.634 50.673,73.825 50.673,76.581 51.008,76.916 60.406,76.916 v1(60.452,76.962)
BOOT1: R29.1 U8.28 | length 40.1
  Top Layer w0.254: v1(41.783,36.957) 42.545,36.195 42.545,32.752 42.553,32.744 42.553,28.928 42.545,28.92 42.545,23.216 R29.1@45.187,20.573 ; v1(50.927,50.673) 51.915,51.661 U8.28@51.915,52.489
  Bottom Layer w0.254: v1(41.783,36.957) 41.783,38.608 42.926,39.751 44.577,39.751 46.228,41.402 46.228,48.641 46.863,49.276 49.53,49.276 v1(50.927,50.673)
C15_2: C15.2 C33.2 R58.1 U1.5 | length 7.4
  Top Layer w0.5: C15.2@78.369,77.343 C33.2@80.761,77.343 ; U1.5@80.01,80.086 80.01,78.867 80.761,78.116 C33.2@80.761,77.343 ; R58.1@80.861,75.438 80.811,75.488 80.811,77.293 C33.2@80.761,77.343
C21_1: C21.1 U3.4 | length 9
  Top Layer w0.5: U3.4@67.172,88.078 67.172,89.554 67.707,90.09 72.049,90.09 73.025,89.114 C21.1@73.025,88.072
C33_1: C33.1 U1.6 | length 3.3
  Top Layer w0.5: U1.6@81.28,80.086 81.299,80.067 81.299,79.314 82.561,78.052 C33.1@82.561,77.343
CM+: 
D+: CN7.2 U3.5 | length 6
  Top Layer w0.5: U3.5@65.902,88.078 CN7.2@65.902,94.061
D-: CN7.3 U3.6 | length 15.6
  Top Layer w0.5: U3.6@64.632,88.078 64.632,89.232 61.389,92.475 61.389,95.044 61.976,95.631 66.216,95.631 CN7.3@67.786,94.061
D_DRIVER: 
D_GND: CN1_1.2 CN3.2 D3.2 LED5.2 Q6.2 R19.1 | length 46.5
  Top Layer w1.2: Q6.2@74.422,57.531 76.822,55.131 LED5.2@79.883,55.131 81.513,55.131 82.348,55.966 D3.2@82.448,55.966 83.791,55.966 84.659,56.834 R19.1@84.709,56.834 87.392,56.834 89.535,54.692 89.535,50.038 90.233,49.34 91.55,49.34 CN3.2@91.741,49.149
  Bottom Layer w1.2: CN3.2@91.741,49.149 91.932,49.34 94.171,49.34 95.377,50.546 95.377,63.5 93.472,65.405 CN1_1.2@92.122,65.405 CN1_1.2@91.741,65.405
D_OUTPUT2: 
DOUT: 
DRIVER1: 
DRIVER2: 
E+: C15.1 CN1.20 Q10.3 R59.2 U1.3 | length 82.7
  Top Layer w0.254: CN1.20@48.514,92.73 48.566,92.73 51.383,95.548 v1(51.435,95.548) ; R59.2@80.861,73.533 80.861,72.339 81.745,71.455 83.012,71.455 83.693,72.136 83.693,77.089 84.201,77.597 84.963,77.597 85.471,78.105 85.471,81.15 87.118,82.797 87.118,90.685 86.233,91.57 86.233,92.349 87.122,93.238 v1(87.122,94.234)
  Top Layer w0.5: U1.3@77.47,80.086 77.47,79.487 76.581,78.598 76.581,77.305 76.569,77.293 78.466,75.396 Q10.3@78.466,74.168 78.466,73.608 78.74,73.333 80.611,73.333 80.861,73.583 R59.2@80.861,73.533
  Bottom Layer w0.254: v1(51.435,95.548) 53.165,97.278 86.237,97.278 87.122,96.393 v1(87.122,94.234)
EX_IN: C18.2 U8.3 X2.2 | length 31
  Top Layer w0.254: C18.2@42.585,40.744 C18.2@42.057,40.744 ; U8.3@44.069,60.797 41.192,60.797 37.846,57.451 37.846,42.678 40.132,40.391 41.705,40.391 C18.2@42.057,40.744 ; X2.2@44.497,40.9 43.983,40.386 42.415,40.386 C18.2@42.057,40.744
EX_OUT: C17.2 U8.4 X2.1 | length 28.5
  Top Layer w0.254: U8.4@44.615,60.289 41.402,60.289 38.46,57.347 38.46,48.843 40.591,46.713 43.947,46.713 45.268,45.392 45.268,44.081 C17.2@45.232,44.046 45.974,43.304 45.974,42.377 X2.1@45.204,41.607
F1_2: C1.2 C13.2 F1.2 R1.2 U12.2
Firekiller: 
GND: C1.1 C2.1 C3.1 C4.1 C5.1 C8.1 C9.2 C10.2 C11.2 C12.1 C13.1 C14.2 C16.1 C17.1 C18.1 C19.2 C20.2 C21.2 C22.1 C23.1 C24.2 C25.1 C26.2 C27.2 C28.2 C29.1 C30.1 C31.1 C34.2 C35.2 CN1.7 CN1.11 CN1.15 CN1.19 CN1.22 CN1.25 CN7.1 CN22.2 CN22.4 CN22.6 CN23.2 DC1.2 DC1.3 H1_1.4 H1_2.2 LED2.2 LED8.2 P4.1 P4_1.2 P5.2 pad.@2.974,3 pad.@2.974,97 Q1.3 Q2.2 Q3.3 Q6.3 Q7.2 Q8.3 Q9.2 R6.2 R11.2 R12.2 R21.2 R32.2 R38.1 R43.1 RLY1.3 RLY2.3 SW1.3 U1.14 U1.15 U2.2 U3.1 U4.2 U6.2 U7.7 U8.12 U8.18 U8.31 U8.47 U8.63 U9.1 U10.1 U11.2 U12.4 U12.9 U20.4 USB4.4 USB4.8 USB4.9 | length 31.2
  Top Layer w0.254: v1(42.18,56.851) 42.599,56.851 43.161,56.289 U8.12@44.615,56.289 ; C14.2@44.44,66.167 44.44,66.99 44.82,67.371 46.352,67.371 46.915,66.808 U8.63@46.915,63.589 46.915,61.356 v2(47.115,61.156) 47.115,56.406 46.915,56.206 U8.18@46.915,52.489 ; v2(52.578,54.229) 52.581,54.226 53.209,54.226 53.415,54.02 53.415,53.467 U8.31@53.415,52.489 53.436,52.468 53.436,51.392 53.707,51.121 v2(53.707,51.054)
  Bottom Layer w0.254: v1(42.18,56.851) 42.59,56.851 43.145,56.296 46.013,56.296 46.907,55.402 v2(46.907,54.378)
  other v1: 59.944,7.304 55.753,10.367 55.753,13.034 32.578,17.054 59.944,22.86 55.753,25.857 55.753,28.524 45.582,28.772 44.246,32.964 44.249,33.585 44.252,34.263 44.246,34.932 42.918,48.721 44.539,48.721 47.915,50.673 40.894,50.732 43.319,51.697 44.497,51.697 40.894,52.412 43.289,52.995 44.497,52.995 40.894,54.085 40.894,55.92 40.894,57.246 42.18,75.057 44.064,75.057 45.84,75.057 42.18,76.236 44.064,76.236 45.84,76.236 34.671,77.089 60.491,81.915 63.489,85.217 62.738,85.979 64.135,85.979 44.837,86.233 45.974,86.233 60.452,86.233 71.882,89.114 61.976,90.09
  other v2: 25.216,19.913 18.426,19.935 19.387,19.935 24.257,19.939 40.811,24.237 39.419,43.688 57.491,49.385 57.491,50.286 55.48,52.081 56.374,52.058 23.986,52.465 29.833,52.489 55.48,52.959 56.374,52.959 23.986,53.062 29.833,53.086 23.986,53.659 29.833,53.683 23.986,54.353 29.833,54.378 23.986,55.015 29.833,55.039 47.875,56.519 53.503,56.519 50.324,57.063 47.875,57.924 53.503,57.924 30.951,58.547 50.324,59.039 47.875,59.182 53.503,59.182 30.998,59.426 32.639,61.595 31.625,61.626 47.804,61.658 56.261,63.786 56.261,64.674 56.261,65.532 42.503,65.786 43.288,65.786 40.535,65.808 40.535,66.636 42.503,66.614 43.288,66.614 60.936,67.346 42.503,67.421 43.288,67.421 63.146,67.972
  other v4: 54.957,61.276
H1_1: 
H1_3: 
H3_4: 
IO1: 
IO2: 
IO3: 
K1_TOP: 
K2_TOP: 
K3_HAND: 
L_DRIVER: 
L_GND: D1.2 LED4.2 P2.2 Q1.2 R7.1 | length 31.7
  Top Layer w1.2: Q1.2@74.422,38.913 76.822,36.514 LED4.2@79.883,36.514 81.395,36.514 82.348,37.467 D1.2@82.448,37.467 83.759,37.467 84.659,38.368 R7.1@84.709,38.368 85.863,38.368 87.503,36.728 87.503,26.162 90.361,23.304 P2.2@91.885,23.304
LED2_1: LED8.1 R40.2 | length 1.6
  Top Layer w0.254: R40.2@83.147,93.942 LED8.1@83.147,95.504
LED3_1: LED3.1 R16.1 | length 2
  Top Layer w0.5: LED3.1@84.836,29.371 R16.1@84.836,31.331
LED5_1: LED5.1 R30.1 | length 2
  Top Layer w0.5: LED5.1@79.883,57.232 R30.1@79.883,59.271
LED7_1: LED7.1 R9.1 | length 2
  Top Layer w0.5: LED7.1@84.836,8.166 R9.1@84.836,10.122
LED111: LED2.1 R13.2 | length 1.9
  Top Layer w0.5: LED2.1@4.788,36.449 4.792,36.445 6.712,36.445 R13.2@6.716,36.441
M1+: C36.2 LED7.2 P1_1.1 P6.2 RLY1.1 | length 40.2
  Top Layer w1.2: RLY1.1@68.326,11.306 79.118,11.306 84.359,6.065 LED7.2@84.836,6.065 84.884,6.017 91.996,6.017 92.329,6.35 92.329,10.16 91.675,10.814 91.675,11.417 90.424,12.668 87.789,12.668 C36.2@84.836,15.621
M1-: C36.1 LED3.2 P1_1.2 RLY2.1 | length 35.2
  Top Layer w1.2: RLY2.1@68.326,26.796 70.231,28.701 82.809,28.701 84.24,27.27 LED3.2@84.836,27.27 C36.1@84.836,22.226 84.836,20.511 87.503,17.844 87.503,16.383 89.408,14.478 91.821,14.478 P1_1.2@91.821,14.262
MOTOR1+: R3.2 U7.3 | length 24.8
  Top Layer w0.5: v1(50.673,28.194) 50.679,28.2 50.679,30.105 U7.3@50.685,30.111 ; v1(54.61,20.828) 56.769,18.669 62.23,18.669 62.738,18.161 R3.2@62.738,15.94
  Bottom Layer w0.5: v1(50.673,28.194) 50.038,27.559 50.038,22.148 50.915,21.271 54.167,21.271 v1(54.61,20.828)
MOTOR1-: R2.2 U7.8 | length 26.4
  Top Layer w0.5: U7.8@45.605,23.911 v1@45.605,25.654 ; v1(50.395,31.797) 51.371,32.773 51.95,32.773 54.229,35.052 61.341,35.052 62.738,33.655 R2.2@62.738,31.434
  Bottom Layer w0.5: v1(45.602,25.651) 45.602,27.004 v1(50.395,31.797)